# EAGLE board Pinduino-Nano-Sys11-adaptor-panalized_2-AR (EAGLE 7.2.0)
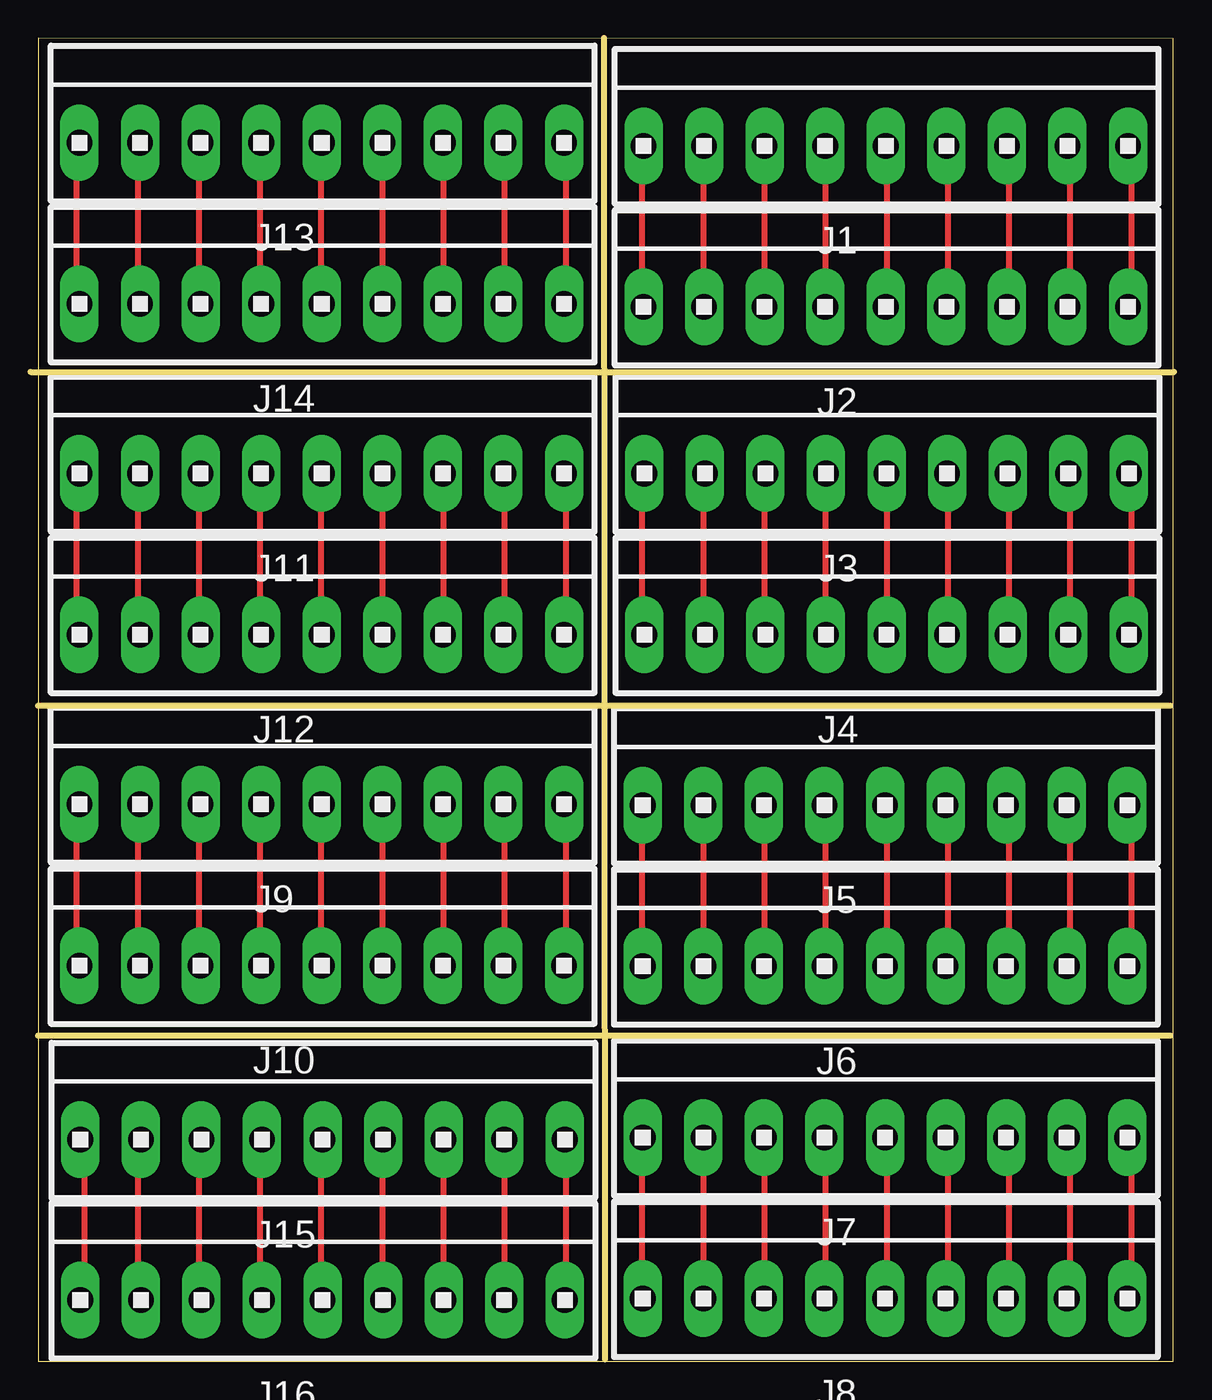
[diagram p0: board, top side]

Size 74.26 x 86.59 mm. Coordinates in mm from the lower left corner, seen from the top.
Outline: 0,0 74.24,0 74.26,86.55 0,86.59 0,0
Copper layers (1*16): Top 0.035mm / dielectric 1.5mm / Bottom 0.035mm
Design rules "SeeedStudio_2layer_DRU_no_angle_20140221": minimum track width 6mil, minimum drill 12mil, track to track 6mil, track to pad 6mil, pad to pad 6mil, via to via 6mil, smd to smd 0mil, copper to edge 10mil, drill to drill 10mil, minimum pad ring 10mil, minimum via ring 6mil, stop-mask expansion 2mil, vias tented up to drill 100mil, thermal gap 10mil
Net classes: 0 default: width 0.406 mm; 1 Power: width 0.61 mm; 2 GND: width 0.61 mm
Milling: 4 lines

## Footprints (pad centres in the part's own frame; a part is rotated, then mirrored left to right if it is on the bottom)
1X9MTA = drill 1.676 long: 1 15.85,0; 2 11.887,0; 3 7.925,0; 4 3.962,0; 5 0,0; 6 -3.962,0; 7 -7.925,0; 8 -11.887,0; 9 -15.85,0

## Placement (x,y rotation side)
J1  [1X9MTA]  55.45,79.55 0 top
J2  [1X9MTA]  55.45,69 0 top
J3  [1X9MTA]  55.5,58.1 0 top
J4  [1X9MTA]  55.5,47.55 0 top
J5  [1X9MTA]  55.4,36.4 0 top
J6  [1X9MTA]  55.4,25.85 0 top
J7  [1X9MTA]  55.4,14.65 0 top
J8  [1X9MTA]  55.4,4.1 0 top
J9  [1X9MTA]  18.55,36.45 0 top
J10  [1X9MTA]  18.55,25.9 0 top
J11  [1X9MTA]  18.55,58.1 0 top
J12  [1X9MTA]  18.55,47.55 0 top
J13  [1X9MTA]  18.55,79.75 0 top
J14  [1X9MTA]  18.55,69.2 0 top
J15  [1X9MTA]  18.6,14.5 0 top
J16  [1X9MTA]  18.6,4 0 top

## Library data of the parts
J1-J16 = con-amp

## Nets
N$1: J9.1 J10.1
N$2: J9.2 J10.2
N$3: J9.3 J10.3
N$4: J9.4 J10.4
N$5: J9.5 J10.5
N$6: J9.7 J10.7
N$7: J9.8 J10.8
N$8: J9.9 J10.9
N$9: J11.1 J12.1
N$10: J11.2 J12.2
N$11: J11.3 J12.3
N$12: J11.4 J12.4
N$13: J11.5 J12.5
N$14: J11.7 J12.7
N$15: J11.8 J12.8
N$16: J11.9 J12.9
N$17: J13.1 J14.1
N$18: J13.2 J14.2
N$19: J13.3 J14.3
N$20: J13.4 J14.4
N$21: J13.5 J14.5
N$22: J13.7 J14.7
N$23: J13.8 J14.8
N$24: J13.9 J14.9
N$25: J15.1 J16.1
N$26: J15.2 J16.2
N$27: J15.3 J16.3
N$28: J15.4 J16.4
N$29: J15.5 J16.5
N$30: J15.7 J16.7
N$31: J15.8 J16.8
N$32: J15.9 J16.9
N$33: J1.6 J2.6
N$34: J1.1 J2.1
N$35: J1.2 J2.2
N$36: J1.3 J2.3
N$37: J1.4 J2.4
N$38: J1.5 J2.5
N$39: J9.6 J10.6
N$40: J1.7 J2.7
N$41: J1.8 J2.8
N$42: J1.9 J2.9
N$43: J3.1 J4.1
N$44: J3.2 J4.2
N$45: J3.3 J4.3
N$46: J3.4 J4.4
N$47: J11.6 J12.6
N$48: J13.6 J14.6
N$49: J15.6 J16.6
N$63: J3.5 J4.5
N$67: J3.6 J4.6
N$68: J3.7 J4.7
N$69: J3.8 J4.8
N$70: J3.9 J4.9
N$71: J5.1 J6.1
N$72: J5.2 J6.2
N$73: J5.3 J6.3
N$74: J5.4 J6.4
N$75: J5.5 J6.5
N$76: J5.6 J6.6
N$77: J5.7 J6.7
N$78: J5.8 J6.8
N$79: J5.9 J6.9
N$80: J7.1 J8.1
N$81: J7.2 J8.2
N$82: J7.3 J8.3
N$83: J7.4 J8.4
N$84: J7.5 J8.5
N$85: J7.6 J8.6
N$86: J7.7 J8.7
N$87: J7.8 J8.8
N$88: J7.9 J8.9

## Tracks (layer width: path | path; a pad name or v marks a point on that pad's centre or on a via)
N$1
  Top 0.406: J10.1 34.5,26 34.5,36 J9.1
N$2
  Top 0.406: J10.2 30.5,26 30.5,36 J9.2
N$3
  Top 0.406: J10.3 26.5,26 26.5,36 J9.3
N$4
  Top 0.406: J10.4 22.5,26 22.5,36 J9.4
N$5
  Top 0.406: J10.5 18.5,26 18.5,36 J9.5
N$6
  Top 0.406: J10.7 10.5,26 10.5,36 J9.7
N$7
  Top 0.406: J10.8 6.5,26 6.5,36 J9.8
N$8
  Top 0.406: J10.9 2.5,26 2.5,36 J9.9
N$9
  Top 0.406: J12.1 34.5,48 34.5,58 J11.1
N$10
  Top 0.406: J12.2 30.5,48 30.5,58 J11.2
N$11
  Top 0.406: J12.3 26.5,48 26.5,58 J11.3
N$12
  Top 0.406: J12.4 22.5,48 22.5,58 J11.4
N$13
  Top 0.406: J12.5 18.5,48 18.5,58 J11.5
N$14
  Top 0.406: J12.7 10.5,48 10.5,58 J11.7
N$15
  Top 0.406: J12.8 6.5,48 6.5,58 J11.8
N$16
  Top 0.406: J12.9 2.5,48 2.5,58 J11.9
N$17
  Top 0.406: J14.1 34.5,69.5 34.5,79.5 J13.1
N$18
  Top 0.406: J14.2 30.5,69.5 30.5,79.5 J13.2
N$19
  Top 0.406: J14.3 26.5,69.5 26.5,79.5 J13.3
N$20
  Top 0.406: J14.4 22.5,69.5 22.5,79.5 J13.4
N$21
  Top 0.406: J14.5 18.5,69.5 18.5,79.5 J13.5
N$22
  Top 0.406: J14.7 10.5,69.5 10.5,79.5 J13.7
N$23
  Top 0.406: J14.8 6.5,69.5 6.5,79.5 J13.8
N$24
  Top 0.406: J14.9 2.5,69.5 2.5,79.5 J13.9
N$25
  Top 0.406: J16.1 34.5,4 34.5,14.5 J15.1
N$26
  Top 0.406: J16.2 J15.2
N$27
  Top 0.406: J16.3 26.5,4 26.5,14.5 J15.3
N$28
  Top 0.406: J16.4 22.5,4 22.5,14.5 J15.4
N$29
  Top 0.406: J16.5 18.5,4 18.5,14.5 J15.5
N$30
  Top 0.406: J16.7 10.5,4 10.5,14.5 J15.7
N$31
  Top 0.406: J16.8 6.5,4 6.5,14.5 J15.8
N$32
  Top 0.406: J16.9 3,4 3,14.5 J15.9
N$33
  Top 0.406: J2.6 51.5,79.5 J1.6
N$34
  Top 0.406: J2.1 71.5,69 71.5,79.5 J1.1
N$35
  Top 0.406: J2.2 67.5,69 67.5,79.5 J1.2
N$36
  Top 0.406: J2.3 63.5,69 63.5,79.5 J1.3
N$37
  Top 0.406: J2.4 59.5,69 59.5,79.5 J1.4
N$38
  Top 0.406: J2.5 55.5,69 55.5,79.5 J1.5
N$39
  Top 0.406: J10.6 14.5,26 14.5,36 J9.6
N$40
  Top 0.406: J2.7 47.5,69 47.5,79.5 J1.7
N$41
  Top 0.406: J2.8 43.5,69 43.5,79.5 J1.8
N$42
  Top 0.406: J2.9 39.5,69 39.5,79.5 J1.9
N$43
  Top 0.406: J4.1 71.5,48 71.5,58 J3.1
N$44
  Top 0.406: J4.2 67.5,48 67.5,58 J3.2
N$45
  Top 0.406: J4.3 63.5,48 63.5,58 J3.3
N$46
  Top 0.406: J4.4 59.5,48 59.5,58 J3.4
N$47
  Top 0.406: J12.6 14.5,48 14.5,58 J11.6
N$48
  Top 0.406: J14.6 14.5,69.5 14.5,79.5 J13.6
N$49
  Top 0.406: J16.6 14.5,4 14.5,14.5 J15.6
N$63
  Top 0.406: J3.5 J4.5
N$67
  Top 0.406: J4.6 51.5,48 51.5,58 J3.6
N$68
  Top 0.406: J4.7 47.5,48 47.5,58 J3.7
N$69
  Top 0.406: J4.8 43.5,48 43.5,58 J3.8
N$70
  Top 0.406: J4.9 39.5,48 39.5,58 J3.9
N$71
  Top 0.406: J6.1 71.5,26 71.5,36 J5.1
N$72
  Top 0.406: J6.2 67.5,26 67.5,36 J5.2
N$73
  Top 0.406: J6.3 63.5,26 63.5,36 J5.3
N$74
  Top 0.406: J6.4 59.5,26 59.5,36 J5.4
N$75
  Top 0.406: J6.5 55.5,26 55.5,36 J5.5
N$76
  Top 0.406: J6.6 51.5,26 51.5,36 J5.6
N$77
  Top 0.406: J6.7 47.5,26 47.5,36 J5.7
N$78
  Top 0.406: J6.8 43.5,26 43.5,36 J5.8
N$79
  Top 0.406: J6.9 39.5,26 39.5,36 J5.9
N$80
  Top 0.406: J8.1 71.5,4.5 71.5,14.5 J7.1
N$81
  Top 0.406: J8.2 67.5,4.5 67.5,14.5 J7.2
N$82
  Top 0.406: J8.3 63.5,4.5 63.5,14.5 J7.3
N$83
  Top 0.406: J8.4 59.5,4.5 59.5,14.5 J7.4
N$84
  Top 0.406: J8.5 55.5,4.5 55.5,14.5 J7.5
N$85
  Top 0.406: J8.6 51.5,4.5 51.5,14.5 J7.6
N$86
  Top 0.406: J8.7 47.5,4.5 47.5,14.5 J7.7
N$87
  Top 0.406: J8.8 43.5,4.5 43.5,14.5 J7.8
N$88
  Top 0.406: J8.9 39.5,4.5 39.5,14.5 J7.9